# Altium PCB Copy of PCB1.PcbDoc
Units mm, origin at the board's own origin, x right, y up, seen from the top; angles counter-clockwise.
Board outline 63.5 x 43.05 mm, 2 copper layers (Top Layer, Bottom Layer); 70 components, 78 nets, 250 pads, 205 vias.
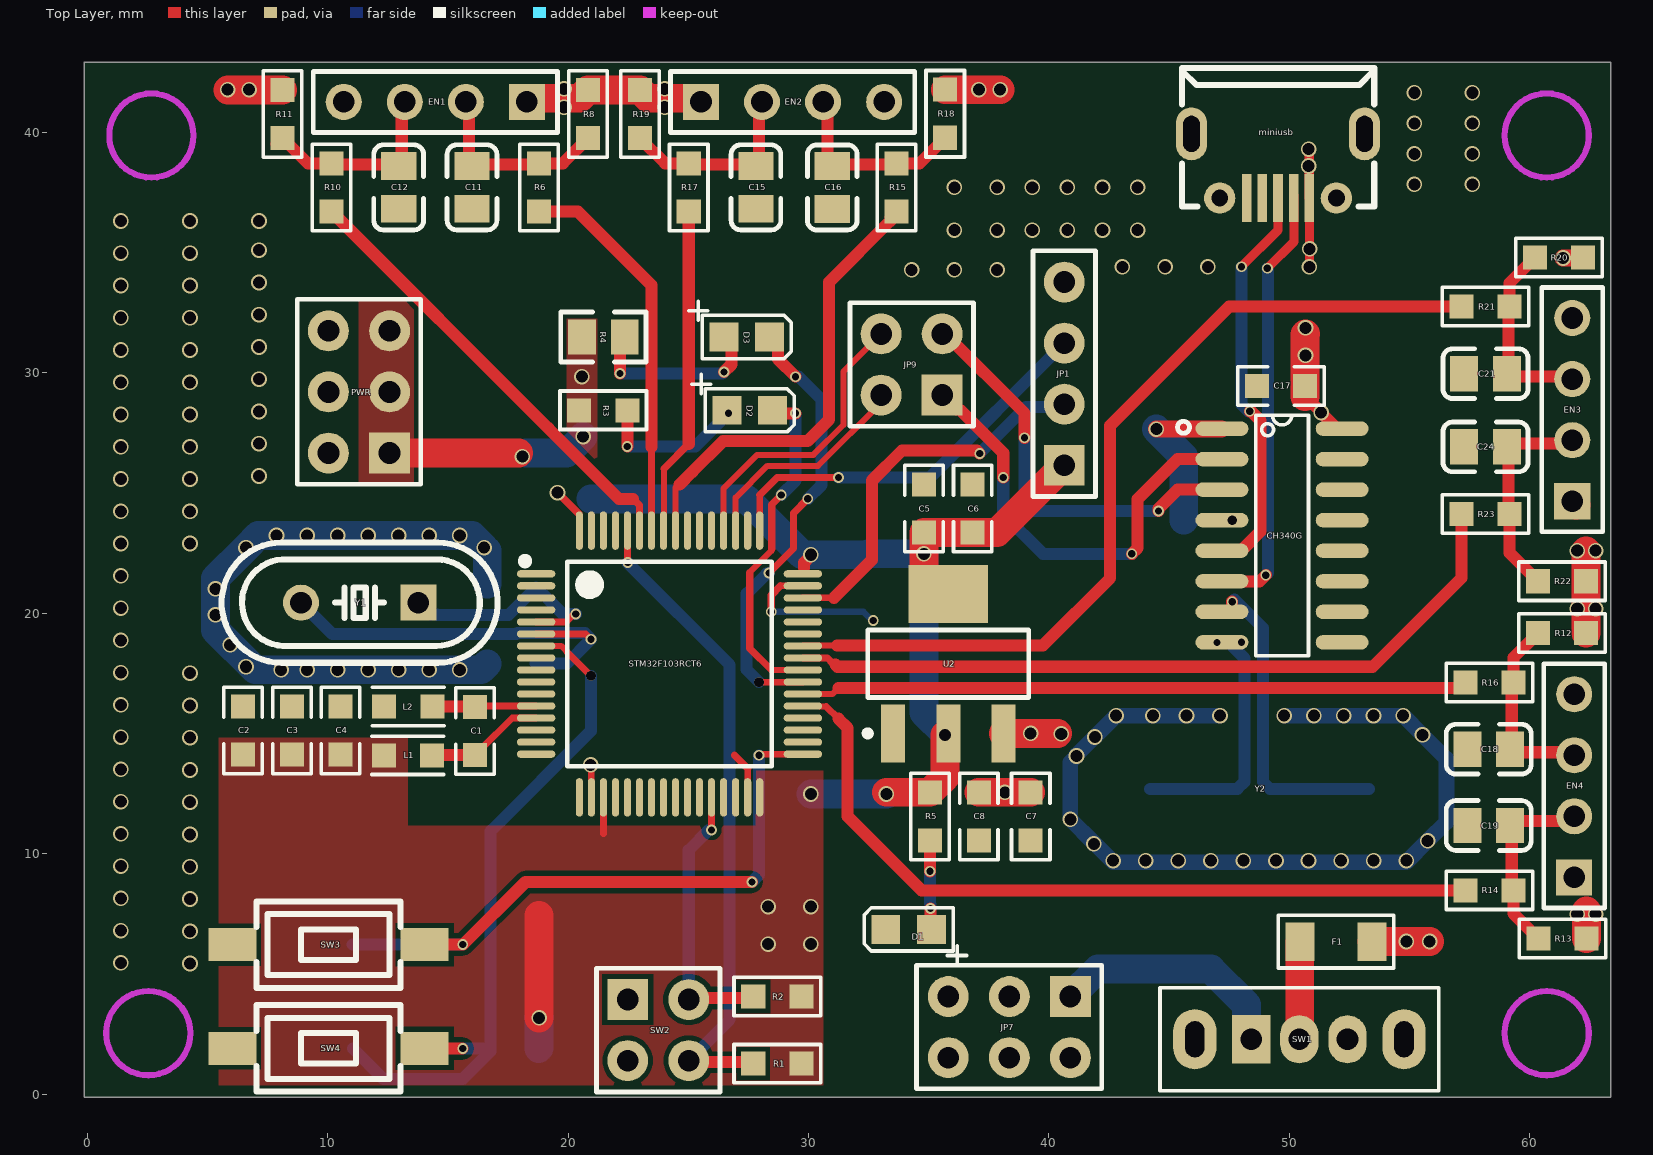
[diagram p0: Top Layer view]
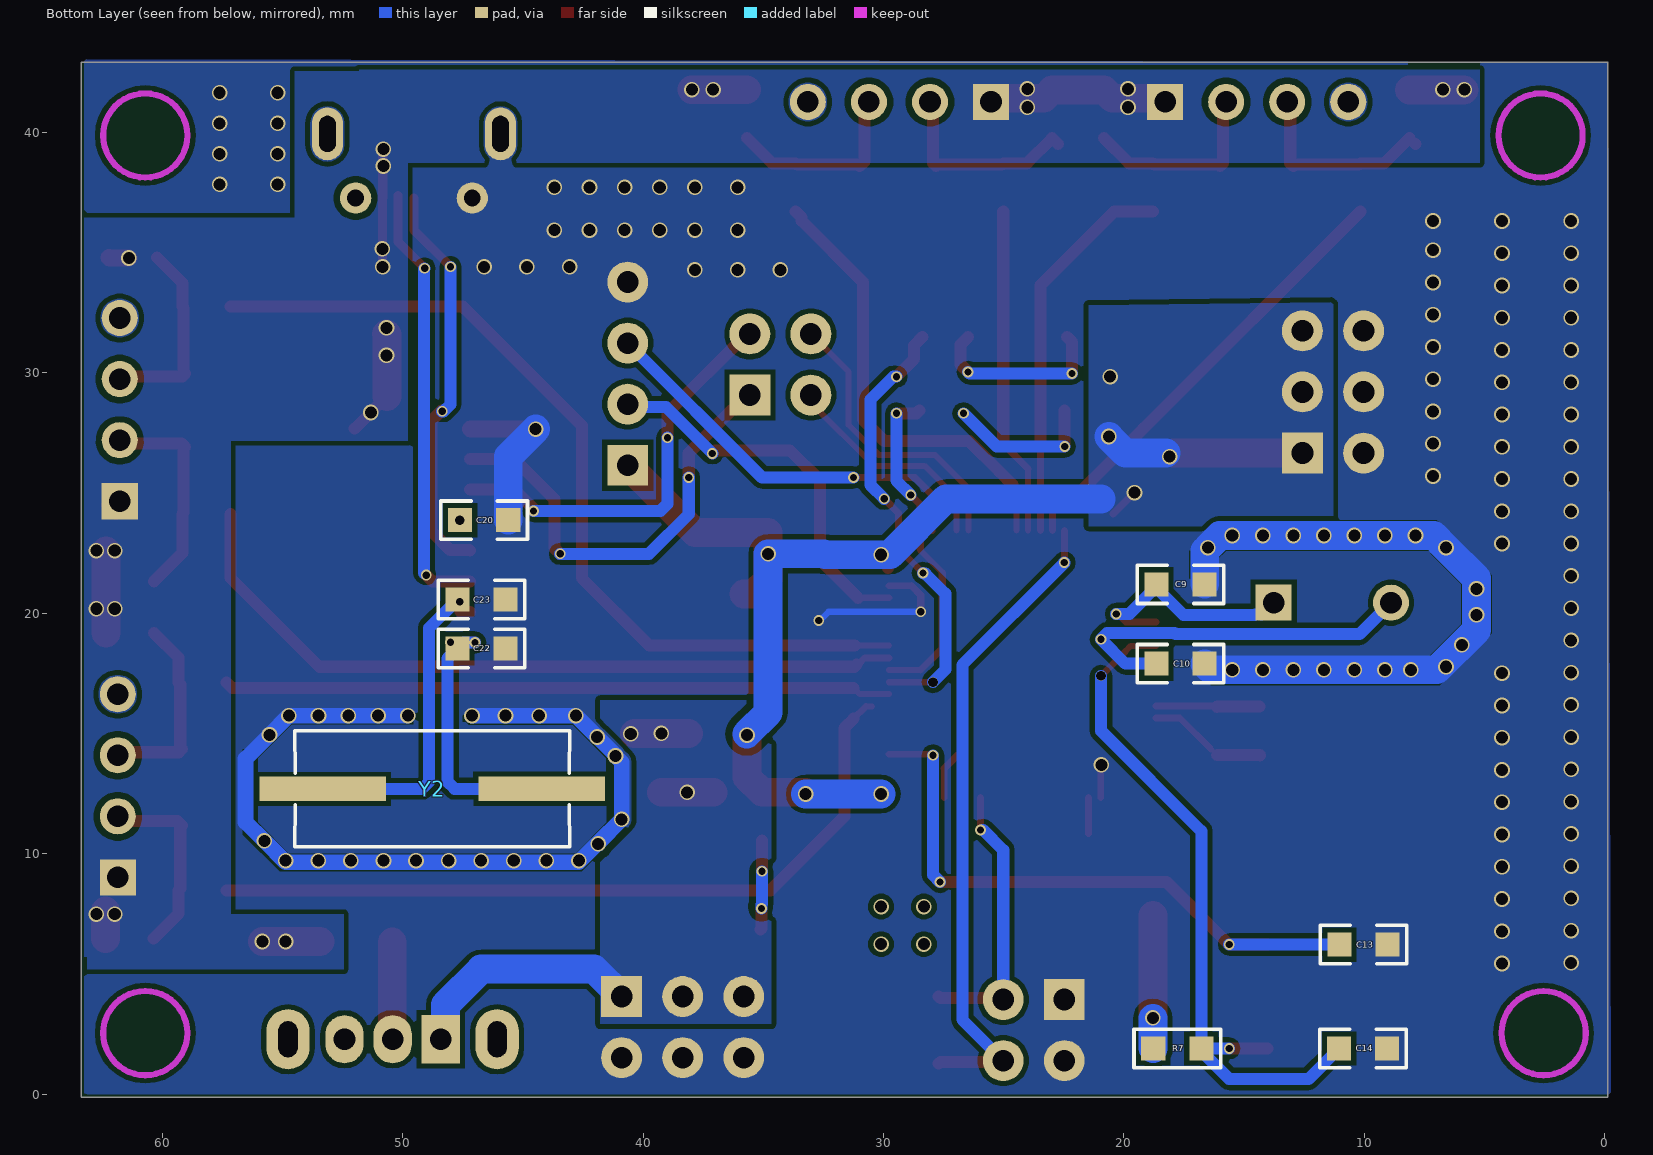
[diagram p1: Bottom Layer view, seen from below]

## Layer stack, top to bottom
Top Solder: solder mask 0.0102, Solder Resist, Dk 3.5
Top Layer: signal copper 0.0356
Dielectric 1: dielectric 0.32, FR-4, Dk 4.8
Bottom Layer: signal copper 0.0356
Bottom Solder: solder mask 0.0102, Solder Resist, Dk 3.5

## Board outline
-0.127,-0.127 -0.127,42.926 63.373,42.926 63.373,-0.127

## Design rules (kind name [scope] priority, off if disabled: settings)
Clearance Clearance_3 [InNetClass('SIGNAL')] p1: gap=0.203 ignorepadtopadclearanceinfootprint=TRUE
Clearance Clearance_1 [InNetClass('GND')] p2: gap=0.203 ignorepadtopadclearanceinfootprint=TRUE
Clearance Clearance_2 [InNetClass('PWR')] p3: gap=0.203 ignorepadtopadclearanceinfootprint=TRUE
Clearance [All] p4: gap=0.203 ignorepadtopadclearanceinfootprint=TRUE except(0.305: Arc-Fill Arc-Poly Arc-Region Track-Fill Track-Poly Track-Region SMDPad-Fill SMDPad-Poly SMDPad-Region THPad-Fill THPad-Poly THPad-Region Via-Fill Via-Poly Via-Region Fill-Fill Fill-Poly Fill-Region Poly-Poly Poly-Region Region-Region)
DiffPairsRouting [All] p1: maxlimit=0.3 minlimit=0.203 mostfreqgap=0.254 toplayer_minwidth=0.203 toplayer_maxwidth=0.254 toplayer_prefwidth=0.254 bottomlayer_minwidth=0.203 bottomlayer_maxwidth=0.254 bottomlayer_prefwidth=0.254 maxuncoupledlength=12.7
PolygonConnect [All] p1: connectstyle=Direct reliefconductorwidth=0.254 reliefentries=4 polygonreliefangle="90 Angle" airgapwidth=0.254
RoutingVias [All] p1: holewidth=0.711 width=1.27 viastyle="Through Hole" minholewidth=0.711 minwidth=1.27 maxholewidth=0.711 maxwidth=1.27
SolderMaskExpansion [All] p1: expansion=0.102 istentingtop=FALSE
Width Width_1 [InNetClass('SIGNAL')] p1: maxlimit=1.2 minlimit=0.254 preferedwidth=0.5 minimp=50.000000 maximp=50.000000 favimp=50.000000
Width [InNetClass('PWR')] p2: maxlimit=1.2 minlimit=0.3 preferedwidth=1.2 minimp=50.000000 maximp=50.000000 favimp=50.000000
Width Width_5 [InNetClass('SIGNAL')] p3: maxlimit=0.5 minlimit=0.3 preferedwidth=0.5 minimp=50.000000 maximp=50.000000 favimp=50.000000
Width Width_2 [InNetClass('GND')] p4: maxlimit=1.2 minlimit=0.3 preferedwidth=1.2 minimp=50.000000 maximp=50.000000 favimp=50.000000
Width Width_4 [InNetClass('PWR')] p5: maxlimit=1.2 minlimit=0.3 preferedwidth=0.254 minimp=50.000000 maximp=50.000000 favimp=50.000000
Width Width_3 [All] p6: maxlimit=10 minlimit=0.3 preferedwidth=0.5 minimp=50.000000 maximp=50.000000 favimp=50.000000
29 further rules are at their usual default settings.

## Classes and differential pairs
net class SIGNAL: BOOT0 BOOT1 CH340_D+ CH340_D- NetC9_1 NetC10_1 NetC11_2 NetC12_2 NetC18_1 NetC19_1 NetC20_1 NetC21_1 NetC22_1 NetC23_1 NetC24_1 NetD1_1 NetD2_1 NetD3_1 NetF1_2 NetJP2_2 NetJP2_3 PA0 PA1 PA2 PA3 PA4 PA5 PA6 PA7 PA8 PA9 PA10 PA11 PA12 PA15 PB0 PB1 PB3 PB4 PB5 PB6 PB7 PB8 PB9 PB10 PB11 PB12 PB13 PB14 PB15 PC0 PC1 PC2 PC3 PC4 PC5 PC6 PC7 PC8 PC9 PC10 PC11 PC12 PC13 PC14 PC15 PD2 RESET RX SWCLK SWDIO TX VDDA VSSA
net class GND: GND
net class PWR: 3.3V 5V VCC

## Components (designator, comment, footprint, x,y, rotation, side; value= is the part's Value field where it differs from the comment)
C1 "0805c" 0805C 16.129,15.113 r90 top
C2 "0805c" 0805C 6.477,15.129 r90 top
C3 "0805c" 0805C 8.509,15.129 r90 top
C4 "0805c" 0805C 10.541,15.129 r90 top
C5 "0805c" 0805C 34.798,24.368 r270 top
C6 "0805c" 0805C 36.83,24.368 r270 top
C7 "0805c" 0805C 39.243,11.557 r270 top
C8 "0805c" 0805C 37.084,11.557 r270 top
C9 "22pF" 0805C 17.653,21.209 r180 bottom
C10 "22pF" 0805C 17.653,17.907 r180 bottom
C11 "10nF" 0805_C 16.002,37.719 r90 top
C12 "10nF" 0805_C 12.954,37.719 r90 top
C13 "0805c" 0805C 10.033,6.223 r180 bottom
C14 "0805c" 0805C 10.049,1.905 r180 bottom
C15 "10nF" 0805_C 27.813,37.719 r90 top
C16 "10nF" 0805_C 30.988,37.718 r270 top
C17 "0805c" 0805C 49.657,29.464 r0 top
C18 "10nF (103) 10% 50V" 0805_C 58.293,14.351 r180 top
C19 "10nF (103) 10% 50V" 0805_C 58.293,11.176 r180 top
C20 "0805c" 0805C 46.609,23.876 r180 bottom
C21 "10nF" 0805_C 58.161,29.972 r180 top
C22 "0805c" 0805C 46.72,18.542 r180 bottom
C23 "0805c" 0805C 46.72,20.574 r180 bottom
C24 "10nF" 0805_C 58.161,26.924 r180 top
CH340G "CH340G" SOP16 49.697,23.241 r270 top (schematic designator U3)
D1 "LED" 0805D 34.163,6.858 r180 top
D2 "LED" 0805D 27.559,28.448 r0 top
D3 "LED" 0805D 27.432,31.496 r0 top
EN1 "PIN4" HDR1X4 18.288,41.275 r180 top (schematic designator JP4)
EN2 "PIN4" HDR1X4 25.527,41.275 r0 top (schematic designator JP2)
EN3 "PIN4" HDR1X4 61.768,24.665 r90 top (schematic designator JP5)
EN4 "PIN4" HDR1X4 61.849,9.017 r90 top (schematic designator JP3)
F1 "FUSE" 1206R 51.943,6.35 r180 top
JP1 "SWD" SWD 40.64,29.972 r90 top
JP7 "PWR5V" PWR 40.894,4.064 r180 top
JP9 "2*2" CON20VP2R54-2X2TM 34.29,30.353 r90 top
L1 "0805L" 0805L 13.335,14.097 r0 top
L2 "0805L" 0805L 13.351,16.129 r0 top
miniusb "miniusb" MICRO-USB-SMD_MICROXNJ 49.53,38.608 r180 top (schematic designator JP8)
PWR "PWR3.3V" PWR 12.573,26.67 r90 top (schematic designator JP6)
R1 "0805r" 0805R 28.702,1.27 r180 top
R2 "0805r" 0805R 28.702,4.064 r180 top
R3 "0805r" 0805R 21.463,28.448 r0 top
R4 "0805r" 0805_R 21.468,31.496 r0 top
R5 "0805r" 0805R 35.052,11.557 r90 top
R6 "10KΩ" 0805R 18.796,37.719 r270 top
R7 "0805r" 0805R 17.78,1.905 r0 bottom
R8 "10KΩ" 0805R 20.828,40.767 r270 top
R10 "10KΩ" 0805R 10.16,37.719 r270 top
R11 "10KΩ" 0805R 8.128,40.767 r270 top
R12 "10KΩ" 0805R 61.341,19.177 r180 top
R13 "10KΩ" 0805R 61.357,6.477 r0 top
R14 "10KΩ" 0805R 58.32,8.482 r0 top
R15 "10KΩ" 0805R 33.655,37.719 r270 top
R16 "10KΩ" 0805R 58.32,17.118 r0 top
R17 "10KΩ" 0805R 25.019,37.719 r270 top
R18 "10KΩ" 0805R 35.687,40.783 r90 top
R19 "10KΩ" 0805R 22.987,40.767 r270 top
R20 "10KΩ" 0805R 61.214,34.798 r180 top
R21 "10KΩ" 0805R 58.166,32.766 r180 top
R22 "10KΩ" 0805R 61.341,21.336 r180 top
R23 "10KΩ" 0805R 58.166,24.13 r180 top
STM32F103RCT6 "STM32F103RCT6" PCBComponent_1 19.98,22.086 r270 top (schematic designator U1)
SW1 "SWTICH_3P" SWITCH_3P 48.419,2.286 r0 top
SW2 "SW_BOOT" CON20VP2R54-2X2TM 23.749,2.667 r270 top
SW3 "KEY" SW-SMD_L6.1-W3.6-LS8.0 10.033,6.223 r180 top
SW4 "KEY" SW-SMD_L6.1-W3.6-LS8.0 10.033,1.905 r180 top
U2 "ASM1117-3.3" SOT223_N 35.814,17.907 r90 top
Y1 "8MHz" HC-49US_L11.5-W4.5-P4.88 11.33,20.447 r180 top
Y2 "8MHz" HC-49S_L11.4-W4.8 48.768,12.7 r180 top

## Footprints (in the part's own frame and the unit in brackets; to place one, negate y for a bottom-side part, rotate by r counter-clockwise, add the part's x,y. Pads: shape width x height; smd on the part's side, far side on the other; paste and mask are expansions set on the pad)
0805_C [mm]
  rect 1.16x1.47 smd: 1(-0.89,0) 2(0.89,0)
  silkscreen extent -1.77,-1.04 1.77,1.04, body extent -1,-0.62 1,0.63, height 0.77
0805_R [mm]
  rect 1.16x1.47 smd: 1(-0.89,0) 2(0.89,0)
  silkscreen extent -1.77,-1.04 1.77,1.03, body extent -1,-0.62 1,0.63, height 0.49
0805C [mm]
  rect 1x1 smd: 1(-1,0) 2(1,0)
  silkscreen extent -1.8,-0.8 1.8,0.8
0805D [mm]
  rect 1.2x1.2 smd: 1(-0.95,0) 2(0.95,0)
  silkscreen extent -2.42,-0.9 1.85,1.49
0805L [mm]
  rect 1x1 smd: 1(-1,0) 2(1,0)
  silkscreen extent -1.5,-0.8 1.5,0.8
0805R [mm]
  rect 1x1 smd: 1(-1,0) 2(1,0)
  silkscreen extent -1.8,-0.8 1.8,0.8
1206R [mm]
  rect 1.2x1.6 smd: 1(-1.5,0) 2(1.5,0)
  silkscreen extent -2.4,-1.1 2.4,1.1
CON20VP2R54-2X2TM [mm]
  rect 1.7x1.7 hole 0.9: 1(-1.27,-1.27)
  round 1.7 hole 0.9: 2(-1.27,1.27) 3(1.27,-1.27) 4(1.27,1.27)
  silkscreen extent -2.57,-2.57 2.57,2.57
HC-49S_L11.4-W4.8 [mm]
  rect 5.274x1.02 smd far side: 1(4.553,0) 2(-4.553,0)
HC-49US_L11.5-W4.5-P4.88 [mm]
  rect 1.5x1.5 hole 0.9: 1(-2.44,0)
  round 1.5 hole 0.9: 2(2.44,0)
  silkscreen extent -5.74,-2.5 5.74,2.5
HDR1X4 [mm] "Connector; Header; 4 Position"
  rect 1.5x1.5 hole 0.9: 1(0,0)
  round 1.5 hole 0.9: 2(2.54,0) 3(5.08,0) 4(7.62,0)
  silkscreen extent -1.27,-1.27 8.89,1.27
MICRO-USB-SMD_MICROXNJ [mm]
  rect 0.4x2 smd: 1(-1.3,1.327) 2(-0.65,1.327) 3(0,1.327) 4(0.65,1.327) 5(1.3,1.327)
  round 1.3 hole 0.7: 6(2.425,1.335) 9(-2.425,1.335)
  oval 1.3x2.2 hole 0.7 slot 1.5 at 90 deg: 7(3.6,-1.335) 8(-3.6,-1.335)
  silkscreen extent -4,-4.07 4,1.68
PCBComponent_1 [mm]
  oval 0.3x1.6 smd: 1(0.441,-1.311) 2(0.941,-1.311) 3(1.441,-1.311) 4(1.941,-1.311) 5(2.441,-1.311) 6(2.941,-1.311) 7(3.441,-1.311) 8(3.941,-1.311) 9(4.441,-1.311) 10(4.941,-1.311) 11(5.441,-1.311) 12(5.941,-1.311) 13(6.441,-1.311) 14(6.941,-1.311) 15(7.441,-1.311) 16(7.941,-1.311) 33(7.941,9.789) 34(7.441,9.789) 35(6.941,9.789) 36(6.441,9.789) 37(5.941,9.789) 38(5.441,9.789) 39(4.941,9.789) 40(4.441,9.789) 41(3.941,9.789) 42(3.441,9.789) 43(2.941,9.789) 44(2.441,9.789) 45(1.941,9.789) 46(1.441,9.789) 47(0.941,9.789) 48(0.441,9.789)
  oval 1.6x0.3 smd: 17(9.741,0.489) 18(9.741,0.989) 19(9.741,1.489) 20(9.741,1.989) 21(9.741,2.489) 22(9.741,2.989) 23(9.741,3.489) 24(9.741,3.989) 25(9.741,4.489) 26(9.741,4.989) 27(9.741,5.489) 28(9.741,5.989) 29(9.741,6.489) 30(9.741,6.989) 31(9.741,7.489) 32(9.741,7.989) 49(-1.359,7.989) 50(-1.359,7.489) 51(-1.359,6.989) 52(-1.359,6.489) 53(-1.359,5.989) 54(-1.359,5.489) 55(-1.359,4.989) 56(-1.359,4.489) 57(-1.359,3.989) 58(-1.359,3.489) 59(-1.359,2.989) 60(-1.359,2.489) 61(-1.359,1.989) 62(-1.359,1.489) 63(-1.359,0.989) 64(-1.359,0.489)
  silkscreen extent -0.24,-1.92 8.44,8.49
PWR [mm]
  rect 1.7x1.7 hole 0.9: 1(0,0)
  round 1.7 hole 0.9: 2(0,2.54) 3(2.54,0) 4(2.54,2.54) 5(5.08,0) 6(5.08,2.54)
  silkscreen extent -1.3,-1.3 6.4,3.84
SOP16 [mm]
  oval 0.6x2.2 smd: 1(-4.445,-2.5) 2(-3.175,-2.5) 3(-1.905,-2.5) 4(-0.635,-2.5) 5(0.635,-2.5) 6(1.905,-2.5) 7(3.175,-2.5) 8(4.445,-2.5) 9(4.445,2.5) 10(3.175,2.5) 11(1.905,2.5) 12(0.635,2.5) 13(-0.635,2.5) 14(-1.905,2.5) 15(-3.175,2.5) 16(-4.445,2.5)
  silkscreen extent -5,-4.35 5,1.1
SOT223_N [mm] "SOT223, 4-Leads, Body 6.5x3.5mm, Pitch 2.3mm, Lead Span 7mm, IPC Medium Density"
  rect 2.4x1 smd: 1(-2.9,2.3) 2(-2.9,0) 3(-2.9,-2.3)
  rect 2.4x3.3 smd: 4(2.9,0)
  silkscreen extent -3.02,-3.35 1.4,3.47, body extent -1.85,-3.35 1.85,3.35, height 1.7
SW-SMD_L6.1-W3.6-LS8.0 [mm]
  rect 2x1.38 smd: 1(-4,0) 2(4,0)
  silkscreen extent -3,-1.8 3,1.8
SWD [mm]
  rect 1.7x1.7 hole 0.9: 1(-3.81,0)
  round 1.7 hole 0.9: 2(-1.27,0) 3(1.27,0) 4(3.81,0)
  silkscreen extent -5.11,-1.3 5.11,1.3
SWITCH_3P [mm]
  rect 1.6x2 hole 0.9: 1(0,0)
  oval 1.6x2 hole 0.9: 2(2,0) 3(4,0)
  oval 1.8x2.5 hole 1.5 slot 0.8 at 0 deg: 4(-2.35,0) 4(6.35,0)
  silkscreen extent -3.8,-2.15 7.8,2.15

## Part data
C9 C10: library part "0805 22pF (220) 5% 50V", "贴片电容", Package=0805, SuppliersPartNumber=C1804, ComponentLink1Description=供应商链接, ComponentLink1URL=http://www.szlcsc.com/product/details_2156.html, Supplier=LC
C11 C12 C15 C16 C18 C19 C21 C24: library part "0805 10nF (103) 10% 50V", "贴片电容", Package=0805, SuppliersPartNumber=C1710, ComponentLink1Description=供应商链接, ComponentLink1URL=http://www.szlcsc.com/product/details_2062.html, Supplier=LC
R6 R8 R10 R11 R12 R13 R14 R15 R16 R17 R18 R19 R20 R21 R22 R23: library part "0805 10KΩ (1002) 1%", "贴片电阻", Package=0805, SuppliersPartNumber=C17414, ComponentLink1Description=供应商链接, ComponentLink1URL=http://www.szlcsc.com/product/details_18102.html, Supplier=LC
STM32F103RCT6: "ARM Cortex-M3 32-bit MCU, 256 KB Flash, 48 KB Internal RAM, 51 I/Os, 64-pin LQFP, -40 to 85 degC, Tray", I/Os (High Current)=51, Operating Frequency(F) (Processor speed) (MHz)=72, Supplier Part Number 1=497-9033-ND, Supply Voltage(Vcc) min (V)=2, A/D Converter="3x12-bit (16 Channel)", ComponentLink1Description="Manufacturer URL", ComponentLink1URL=http://www.st.com/web/en/home.html, ComponentLink2Description=Datasheet, ComponentLink2URL=http://www.st.com/st-web-ui/static/active/en/resource/technical/document/datasheet/CD00191185.pdf, ComponentLink3Description="Package Specification", ComponentLink3URL=http://www.st.com/st-web-ui/static/active/en/resource/technical/document/datasheet/DM00037051.pdf, Core="ARM Cortex-M3", D/A Converter="2x12-bit (2 Channel)", DatasheetVersion="Rev. 8", FLASH Size (Prog) (kB)=256, Internal RAM Size (kB)=48, Mounting Technology="Surface Mount", PackageDescription="64-Pin Low Profile Quad Flat Package, 10 x 10 mm Body, 0.5 mm Pitch", PackageReference=LQFP64, PackageVersion="Rev. 4, 06/2013", Packing=Tray, PartNumber=STM32F103RCT6, Supplier 1=Digi-Key, Supplier 2=Newark, Supplier 3=Newark, Supplier 4=Mouser, Supplier Part Number 2=01P4099, Supplier Part Number 3=57P1227, Supplier Part Number 4=511-STM32F103RCT6
SW3 SW4: library part KEY_4P
Y1 Y2: library part "SMD-5032_2P 8MHz 20ppm 20pF", "贴片晶振", Package=SMD-5032_2P, SuppliersPartNumber=C115962, ComponentLink1Description=供应商链接, ComponentLink1URL=http://www.szlcsc.com/product/details_117214.html, Supplier=LC

## Via types
v1: diameter 0.65, hole 0.5, Top Layer to Bottom Layer, 168 vias
v2: diameter 0.45, hole 0.3, Top Layer to Bottom Layer, 34 vias
v3: diameter 0.4, hole 0.4, Top Layer to Bottom Layer, 3 vias

## Nets (pads, with @x,y where several pads share a name; then routed paths per layer and width w, separated by ;. In a path a pad name is that pad's centre, name@x,y a point inside that pad or via, vN(x,y) a via of type N, cw(c..) or ccw(c..) an arc to the next point about the centre after c; other vN are vias at no path point)
3.3V: C2.1 C3.1 C4.1 C5.2 C6.2 JP1.1 L1.1 PWR.1 PWR.3 PWR.5 R1.1 R2.1 R3.1 R4.1 R5.2 R7.2 STM32F103RCT6.19 STM32F103RCT6.32 STM32F103RCT6.48 STM32F103RCT6.64 U2.2 U2.4 | length 57.5
  Top Layer w0.279: 21.469,10.839 STM32F103RCT6.19
  Top Layer w0.3: v1(19.558,25.019) 19.573,25.019 STM32F103RCT6.64@20.447,24.145
  Top Layer w0.5: 29.814,21.889 29.814,22.112 30.099,22.398 v1(30.099,22.438)
  Top Layer w1.2: PWR.1 v1@17.951,26.67 ; v1(18.796,3.175) 18.796,7.428 ; v1@33.241,12.557 R5.2 35.679,13.184 v1(35.679,14.938) ; U2.4 35.398,20.807 34.798,21.407 v1(34.798,22.479) C5.2 C6.2 37.846,23.368 JP1.1
  Bottom Layer w1.2: v1@18.251,26.67 19.939,26.67 v1(20.624,27.355) ; R7.2 18.796,1.921 v1@18.796,3.162 ; 20.955,24.765 27.403,24.765 29.729,22.438 v1(30.099,22.438) 32.428,22.438 32.469,22.479 v1(34.798,22.479) 34.798,15.875 v1@35.687,14.986 ; v1(30.099,12.488) v1(33.241,12.488)
  other v1: 28.321,6.239 30.099,6.239 28.321,7.801 30.099,7.801 18.101,26.52 20.574,29.845
5V: C7.1 C8.1 JP7.1 JP7.3 JP7.5 SW1.1 U2.3 | length 14.3
  Top Layer w1.2: C8.1 v1(38.163,12.557) C7.1 ; U2.3 v1(39.239,15.007) ; v1@39.243,15.004 v1(39.239,15.007) ; v1@40.365,15.007 40.132,15.007 v1(39.239,15.007)
  Bottom Layer w1.2: JP7.1 42.037,5.207 46.736,5.207 48.219,3.724 48.219,2.486 SW1.1
  other v1: 40.513,14.986
BOOT0: R1.2 STM32F103RCT6.60 SW2.4 | length 27.2
  Top Layer w0.279: v2@22.469,22.123 STM32F103RCT6.60
  Top Layer w0.3: v2@22.469,22.123 v2(22.481,22.111)
  Top Layer w0.5: SW2.4 25.082,1.333 27.638,1.333 R1.2
  Bottom Layer w0.5: v2(22.481,22.111) 22.481,22.096 26.72,17.857 26.72,3.098 SW2.4
BOOT1: R2.2 STM32F103RCT6.28 SW2.2 | length 11.5
  Top Layer w0.279: v2@25.969,10.991 STM32F103RCT6.28
  Top Layer w0.3: v2(25.966,10.988) v2@25.969,10.991
  Top Layer w0.5: SW2.2 25.082,4 27.638,4 R2.2
  Bottom Layer w0.5: SW2.2 25.019,10.152 v2@25.855,10.988
CH340_D+: CH340G.5 miniusb.3 | length 16.9
  Top Layer w0.381: v2(48.006,34.417) 49.53,35.941 miniusb.3
  Top Layer w0.5: CH340G.5 47.23,22.639 48.03,22.639 48.801,23.41 48.801,28.019 48.386,28.434 v2(48.356,28.405)
  Bottom Layer w0.5: v2(48.006,34.417) 48.006,28.698 48.299,28.405 v2(48.356,28.405)
CH340_D-: CH340G.6 miniusb.2 | length 18.1
  Top Layer w0.381: v2(49.085,34.353) 50.194,35.462 miniusb.2@50.194,37.378
  Top Layer w0.5: CH340G.6 48.768,21.336 v2(49.022,21.59)
  Bottom Layer w0.5: v2@49.085,21.653 49.11,21.678 49.11,34.329 v2(49.085,34.353)
GND: C2.2 C3.2 C4.2 C5.1 C6.1 C7.2 C8.2 C9.2 C10.2 C11.1 C12.1 C13.2 C14.2 C15.1 C16.2 C17.1 C18.2 C19.2 C20.2 C21.2 C22.2 C23.2 C24.2 CH340G.1 D1.2 EN1.4 EN2.4 EN3.4 EN4.4 JP1.4 JP7.2 JP7.4 JP7.6 L2.1 miniusb.5 miniusb.6 miniusb.7 miniusb.8 miniusb.9 PWR.2 PWR.4 PWR.6 STM32F103RCT6.1 STM32F103RCT6.18 STM32F103RCT6.31 STM32F103RCT6.47 STM32F103RCT6.63 SW2.1 SW2.3 SW3.2 SW4.2 U2.1 | length 81.3
  Top Layer w0.279: STM32F103RCT6.18 v1@20.969,13.745 ; STM32F103RCT6.31 27.469,13.552 ; 28.835,21.145 STM32F103RCT6.47
  Top Layer w0.3: 26.924,14.097 27.469,13.552 ; v2(28.448,20.066) 28.448,20.758 28.835,21.145
  Top Layer w0.7: v1(44.467,27.664) CH340G.1@47.175,27.664
  Bottom Layer w0.254: 5.804,21.853 5.804,21.858 ; v2(28.448,20.066) 32.285,20.066 32.639,19.712 v2@32.639,19.685 ; v1(41.865,10.414) v1@41.918,10.414 ; v1@41.899,14.859 v1(41.91,14.859) ; v1@42.672,9.652 v1@42.672,9.66
  Bottom Layer w0.65: v1(41.148,14.068) 40.894,13.814 v1(40.894,11.43) 41.865,10.459 v1(41.865,10.414) ; v1@41.148,14.108 v1@41.899,14.859 ; v1(41.91,14.859) v1(42.799,15.748) v1(44.323,15.748) v1(45.72,15.748) v1(47.117,15.748) ; v1@41.918,10.414 v1@42.672,9.66 ; v1@42.672,9.652 54.864,9.652 v1(55.753,10.541) 56.537,11.325 56.537,13.948 v1(55.538,14.947) v1(54.737,15.748) v1(53.499,15.748) v1(52.261,15.748) v1(51.022,15.748) v1(49.784,15.748)
  Bottom Layer w1.2: v1(16.51,22.733) 16.002,23.241 v1(14.224,23.241) v1(12.954,23.241) v1(11.684,23.241) v1(10.414,23.241) v1(9.144,23.241) v1(7.874,23.241) 7.112,23.241 v1(6.604,22.733) 5.334,21.463 v1(5.334,21.018) v1(5.334,19.939) 5.334,19.304 6.985,17.653 v1(8.065,17.653) v1(9.144,17.653) v1(10.414,17.653) v1(11.684,17.653) v1(12.954,17.653) v1(14.224,17.653) v1(15.494,17.653) 16.383,17.653 C10.2@16.637,17.907 ; C9.2@16.637,21.225 v1@16.637,22.606 ; v1(44.467,27.664) 45.609,26.522 C20.2
  other v1: 4.272,5.436 1.397,5.461 4.272,6.778 1.397,6.803 4.272,8.119 1.397,8.145 4.272,9.461 1.397,9.486 42.669,9.716 44.024,9.716 45.379,9.716 46.734,9.716 48.089,9.716 49.444,9.716 50.799,9.716 52.154,9.716 53.509,9.716 54.864,9.716 4.272,10.803 1.397,10.828 4.272,12.145 1.397,12.17 4.272,13.487 1.397,13.512 20.94,13.7 4.272,14.828 1.397,14.853 4.272,16.17 1.397,16.195 4.272,17.512 1.397,17.537 6.604,17.78 5.944,18.694 1.397,18.879 1.397,20.221 1.397,21.562 1.397,22.904 4.272,22.904 15.494,23.241 1.397,24.246 4.272,24.246 1.397,25.588 4.272,25.588 7.146,25.715 1.397,26.929 4.272,26.93 7.146,27.057 1.397,28.271 4.272,28.271 7.146,28.398 1.397,29.613 4.272,29.613 7.146,29.74 1.397,30.955 4.272,30.955 7.146,31.082 1.397,32.297 4.272,32.297 7.146,32.424 1.397,33.638 4.272,33.638 7.146,33.765 34.29,34.29 36.068,34.29 37.846,34.29 43.053,34.417 44.831,34.417 46.609,34.417 1.397,34.98 4.272,34.98 7.146,35.107 36.068,35.941 37.846,35.941 39.307,35.941 40.767,35.941 42.227,35.941 43.688,35.941 1.397,36.322 4.272,36.322 7.146,36.322 36.068,37.719 37.846,37.719 39.307,37.719 40.767,37.719 42.227,37.719 43.688,37.719 55.199,37.846 57.612,37.846 55.199,39.116 57.612,39.116 55.199,40.386 57.612,40.386 55.199,41.656 57.612,41.656
  other v2: 32.695,19.709
NetC9_1: C9.1 STM32F103RCT6.5 Y1.1 | length 9.2
  Top Layer w0.279: STM32F103RCT6.5 19.919,19.645 v2@20.222,19.948
  Top Layer w0.3: v2@20.222,19.948 20.291,19.948 v2(20.32,19.977)
  Bottom Layer w0.5: Y1.1 Y1.1@14.27,19.947 ; 14.555,19.947 14.563,19.939 17.526,19.939 18.669,21.082 19.774,19.977 v2(20.32,19.977)
NetC10_1: C10.1 STM32F103RCT6.6 Y1.2 | length 17.8
  Top Layer w0.279: STM32F103RCT6.6 20.733,19.145 v2(20.955,18.923)
  Bottom Layer w0.5: Y1.2 10.198,19.139 17.857,19.139 17.895,19.177 20.701,19.177 v2(20.955,18.923) 19.939,17.907 C10.1
NetC11_2: C11.2 EN1.2 R6.1 R8.2 | length 8.2
  Top Layer w0.5: EN1.2@15.811,41.338 EN1.2 15.875,41.148 15.875,38.736 C11.2 16.057,38.664 18.741,38.664 R6.1 19.78,38.719 R8.2
NetC12_2: C12.2 EN1.3 R10.1 R11.2 | length 8.1
  Top Layer w0.5: R11.2 9.176,38.719 R10.1 10.215,38.664 12.899,38.664 C12.2 13.081,38.736 13.081,41.148 EN1.3
NetC18_1: C18.1 EN4.3 R12.2 R16.2 | length 8.1
  Top Layer w0.5: R12.2 59.32,18.156 R16.2 59.251,17.049 59.251,14.419 C18.1 59.31,14.224 61.722,14.224 EN4.3
NetC19_1: C19.1 EN4.2 R13.1 R14.2 | length 8
  Top Layer w0.5: R13.1 59.32,7.514 R14.2 59.251,8.551 59.251,11.108 C19.1 59.374,11.367 61.658,11.367 EN4.2
NetC20_1: C20.1 CH340G.4
  other v3: 47.625,23.876
NetC21_1: C21.1 EN3.3 R20.2 R21.1 | length 8.1
  Top Layer w0.5: R20.2 59.166,33.75 R21.1 59.108,32.708 59.108,30.029 C21.1 59.164,29.859 61.654,29.859 EN3.3
NetC22_1: C22.1 CH340G.8 Y2.1 | length 10.8
  Top Layer w0.5: v2(46.994,18.792) 47.193,18.792 CH340G.8
  Bottom Layer w0.5: Y2.1 47.84,12.7 48.133,12.993 48.133,18.129 47.47,18.792 v2(46.994,18.792)
  other v2: 48.006,18.796
NetC23_1: C23.1 CH340G.7 Y2.2 | length 13.4
  Top Layer w0.5: CH340G.7 47.579,20.066 47.625,20.112 v2(47.625,20.486)
  Bottom Layer w0.5: C23.1 48.895,19.399 48.895,12.993 49.188,12.7 Y2.2
NetC24_1: C24.1 EN3.2 R22.2 R23.1 | length 9
  Top Layer w0.5: R22.2 60.091,21.586 59.166,22.511 R23.1 59.108,24.188 59.108,26.867 C24.1 59.191,27.065 61.627,27.065 EN3.2
NetD1_1: D1.1 R5.1 | length 3.7
  Top Layer w0.5: v2(35.052,9.271) R5.1 ; v2(35.076,7.728) 35.076,6.895 D1.1
  Bottom Layer w0.5: v2(35.052,9.271) 35.052,7.919 35.076,7.895 v2(35.076,7.728)
NetD2_1: D2.1 R3.2 | length 6.3
  Top Layer w0.5: v2(22.463,26.94) R3.2
  Bottom Layer w0.5: v2(22.463,26.94) 25.289,26.94 v2(26.67,28.321)
NetD3_1: D3.1 R4.2 | length 7.7
  Top Layer w0.5: v2(22.157,29.978) 22.157,31.295 R4.2 ; v2(26.482,30.038) 26.797,30.353 26.797,31.181 D3.1
  Bottom Layer w0.5: v2(22.157,29.978) 26.422,29.978 v2(26.482,30.038)
NetF1_2: F1.2 SW1.2 | length 4.1
  Top Layer w0.5: SW1.2 SW1.2@50.431,2.298 ; F1.2@50.431,6.338 F1.2
  Top Layer w1.2: SW1.2@50.431,2.298 F1.2@50.431,6.338
NetJP2_2: C15.2 EN2.2 R17.1 R19.2 | length 8.6
  Top Layer w0.5: R19.2@22.737,39.517 R19.2 24.035,38.719 R17.1 25.074,38.664 27.758,38.664 C15.2 27.94,38.736 27.94,41.148 EN2.2 EN2.2@27.94,41.402
NetJP2_3: C16.1 EN2.3 R15.1 R18.1 | length 8.2
  Top Layer w0.5: EN2.3@30.734,41.402 EN2.3 30.797,41.084 30.797,38.798 C16.1 31.043,38.663 33.6,38.663 R15.1 34.623,38.719 35.437,39.533 R18.1
PA0: STM32F103RCT6.14
PA1: STM32F103RCT6.15
PA2: STM32F103RCT6.16
PA3: STM32F103RCT6.17
PA4: STM32F103RCT6.20
PA5: STM32F103RCT6.21
PA6: STM32F103RCT6.22
PA7: STM32F103RCT6.23
PA8: R23.2 STM32F103RCT6.41 | length 31.7
  Top Layer w0.279: STM32F103RCT6.41 30.789,18.145
  Top Layer w0.3: 30.789,18.145 31.011,17.924 31.027,17.924 31.082,17.869
  Top Layer w0.5: 31.12,17.869 31.209,17.78 53.467,17.78 57.166,21.479 R23.2
PA9: R21.2 STM32F103RCT6.42 | length 36.8
  Top Layer w0.254: STM32F103RCT6.42@29.763,18.66 30.991,18.66
  Top Layer w0.5: 31.19,18.669 39.751,18.669 42.545,21.463 42.545,27.813 47.498,32.766 R21.2
PA10: STM32F103RCT6.43
PA11: STM32F103RCT6.44
PA12: STM32F103RCT6.45
PA15: STM32F103RCT6.50
PB0: STM32F103RCT6.26
PB1: STM32F103RCT6.27
PB3: STM32F103RCT6.55
PB4: R15.2 STM32F103RCT6.56 | length 18.9
  Top Layer w0.254: STM32F103RCT6.56 24.469,25.231
  Top Layer w0.5: 24.639,25.358 25.168,25.886 26.453,27.172 29.966,27.172 30.861,28.067 30.861,33.782 33.405,36.326 33.405,36.469 R15.2
PB5: R17.2 STM32F103RCT6.57 | length 13.7
  Top Layer w0.254: STM32F103RCT6.57@23.985,23.445 23.985,26.017
  Top Layer w0.3: 23.985,26.017 25.019,27.051
  Top Layer w0.5: 25.019,27.051 25.019,35.306 R17.2
PB6: R6.2 STM32F103RCT6.58 | length 16.2
  Top Layer w0.279: STM32F103RCT6.58 23.469,26.924
  Top Layer w0.5: R6.2 20.405,36.719 23.469,33.655 23.469,26.924
PB7: R10.2 STM32F103RCT6.59 | length 18.9
  Top Layer w0.279: STM32F103RCT6.59 22.969,24.5
  Top Layer w0.3: 22.704,24.765 22.969,24.5
  Top Layer w0.5: R10.2 19.177,27.702 22.114,24.765 22.704,24.765
PB8: STM32F103RCT6.61
PB9: STM32F103RCT6.62
PB10: STM32F103RCT6.29
PB11: STM32F103RCT6.30
PB12: C13.1 STM32F103RCT6.33 SW3.1 | length 26.5
  Top Layer w0.279: v2@27.988,14.145 STM32F103RCT6.33
  Top Layer w0.5: SW3.1 v2(15.621,6.223) 18.228,8.83 v2(27.647,8.83)
  Bottom Layer w0.5: C13.1 v2(15.621,6.223) ; v2(27.647,8.83) 27.94,9.123 v2(27.94,14.097)
PB13: STM32F103RCT6.34
PB14: STM32F103RCT6.35
PB15: STM32F103RCT6.36
PC0: STM32F103RCT6.8
PC1: STM32F103RCT6.9
PC2: STM32F103RCT6.10
PC3: STM32F103RCT6.11
PC4: STM32F103RCT6.24
PC5: STM32F103RCT6.25
PC6: R14.1 STM32F103RCT6.37 | length 32.2
  Top Layer w0.254: STM32F103RCT6.37@30.48,16.129 30.734,16.129
  Top Layer w0.279: 30.734,16.129 31.242,15.621
  Top Layer w0.5: 31.242,15.621 31.623,15.24 31.623,11.557 34.698,8.482 R14.1
PC7: R16.1 STM32F103RCT6.38 | length 27.7
  Top Layer w0.254: STM32F103RCT6.38 30.996,16.645 31.242,16.891
  Top Layer w0.5: 31.242,16.891 57.093,16.891 R16.1
PC8: D3.2 STM32F103RCT6.39 | length 18.7
  Top Layer w0.254: v3(27.94,17.137) STM32F103RCT6.39@29.769,17.137
  Top Layer w0.3: v2(28.359,21.682) 29.377,22.7 29.377,24.17 v2(29.972,24.765)
  Top Layer w0.5: D3.2 28.728,31.15 28.728,30.581 v2(29.464,29.845)
  Bottom Layer w0.5: v3@27.949,17.136 27.428,17.657 27.428,20.824 28.258,21.653 28.33,21.653 v2(28.359,21.682) ; v2(29.464,29.845) 29.591,29.845 30.548,28.888 30.548,26.322 30.548,25.341 v2(29.972,24.765)
PC9: D2.2 STM32F103RCT6.40 | length 14.2
  Top Layer w0.254: 27.559,21.706 28.449,22.596 28.449,22.659 28.472,22.682 ; 28.456,17.645 STM32F103RCT6.40
  Top Layer w0.3: 27.559,21.706 27.559,18.542 28.456,17.645 ; 28.472,22.682 28.472,24.527 v2(28.87,24.925)
  Top Layer w0.5: D2.2 28.636,28.321 v2(29.464,28.321)
  Bottom Layer w0.5: v2(28.87,24.925) 29.464,25.519 v2(29.464,28.321)
PC10: JP9.2 STM32F103RCT6.51 | length 9.4
  Top Layer w0.254: STM32F103RCT6.51 26.969,24.81 28.293,26.134 30.395,26.134 33.02,28.759 JP9.2
PC11: JP9.4 STM32F103RCT6.52 | length 12.3
  Top Layer w0.254: STM32F103RCT6.52 26.469,25.199 27.861,26.591 30.206,26.591 31.45,27.835 31.45,30.053 JP9.4
PC12: STM32F103RCT6.53
PC13: STM32F103RCT6.2
PC14: STM32F103RCT6.3
PC15: STM32F103RCT6.4
PD2: STM32F103RCT6.54
RESET: C14.1 R7.1 STM32F103RCT6.7 SW4.1 | length 29.5
  Top Layer w0.254: STM32F103RCT6.7 19.709,18.645 19.939,18.415
  Top Layer w0.279: 19.939,18.415 v3(20.955,17.399)
  Top Layer w0.5: SW4.1 14.037,1.901 v2(15.617,1.901)
  Bottom Layer w0.5: C14.1 12.319,0.635 15.621,0.635 R7.1@16.764,1.778 ; v2@15.621,1.905 R7.1 16.78,10.938 20.955,15.113 v3(20.955,17.399)
RX: CH340G.3 JP9.3 | length 17.3
  Top Layer w0.5: JP9.3 35.687,31.623 38.989,28.321 v2(38.989,27.305) ; v2(44.556,24.257) 44.556,24.355 45.347,25.146 CH340G.3
  Bottom Layer w0.5: v2(38.989,27.305) 38.989,24.55 39.282,24.257 v2(44.556,24.257)
SWCLK: JP1.3 STM32F103RCT6.49 | length 16.8
  Top Layer w0.279: STM32F103RCT6.49 27.969,24.921
  Top Layer w0.3: 27.969,24.921 28.702,25.654 v2(31.251,25.654)
  Bottom Layer w0.5: v2(31.251,25.654) 35.052,25.654 JP1.3
SWDIO: JP1.2 STM32F103RCT6.46 | length 16.2
  Top Layer w0.279: STM32F103RCT6.46 31.059,20.645
  Top Layer w0.5: 31.059,20.645 32.639,22.225 32.639,25.527 33.884,26.772 37.004,26.772 v2(37.12,26.656)
  Bottom Layer w0.5: v2(37.12,26.656) 39.04,28.576 40.514,28.576 JP1.2
TX: CH340G.2 JP9.1 | length 18.7
  Top Layer w0.5: JP9.1 36.16,28.483 36.287,28.483 38.1,26.67 v2(38.1,25.654) ; v2(43.447,22.479) 43.688,22.72 43.688,24.757 45.347,26.416 CH340G.2
  Bottom Layer w0.5: v2(38.1,25.654) 38.1,24.13 39.751,22.479 v2(43.447,22.479)
VCC: C17.2 CH340G.16 EN1.1 EN2.1 EN3.1 EN4.1 F1.1 miniusb.1 R8.1 R11.1 R12.1 R13.2 R18.2 R19.1 R20.1 R22.1 | length 29.6
  Top Layer w0.381: v1(50.83,34.417) 50.838,34.425 50.838,35.153 v1(50.847,35.161) 50.838,35.17 50.838,37.272 miniusb.1 50.83,38.608 v1@50.83,39.313
  Top Layer w0.5: C17.2@50.657,29.026 CH340G.16@51.997,27.686
  Top Layer w0.7: v1(61.388,34.78) 62.196,34.78 R20.1
  Top Layer w1.2: v1@5.858,41.767 R11.1 ; EN1.1 18.438,41.425 20.193,41.425 20.486,41.425 R8.1 R19.1 23.329,41.425 25.377,41.425 EN2.1 ; R18.2 v1(37.084,41.783) v1(37.973,41.783) ; C17.2@50.657,29.026 C17.2 50.657,31.607 v1@50.673,31.623 ; F1.1 v1(54.864,6.35) v1(55.838,6.35) ; EN3.1 EN3.1@61.918,24.515 ; R12.1 R22.1 62.341,22.606 ; R13.2 62.357,7.62
  other v1: 61.976,7.493 62.738,7.493 61.976,20.193 62.738,20.193 61.976,22.606 62.738,22.606 51.327,28.356 50.673,30.734 50.673,31.877 50.8,38.608 50.8,39.313 19.828,41.053 24.019,41.053 5.842,41.783 6.731,41.783 19.828,41.815 24.019,41.815
VDDA: C1.1 L1.2 STM32F103RCT6.13 | length 4.6
  Top Layer w0.279: C1.1@16.383,14.351 17.677,15.645 STM32F103RCT6.13
  Top Layer w0.5: L1.2 14.343,14.105 16.121,14.105 C1.1
VSSA: C1.2 L2.2 STM32F103RCT6.12 | length 4.3
  Top Layer w0.279: C1.2@16.121,16.145 STM32F103RCT6.12
  Top Layer w0.5: L2.2 14.359,16.121 16.121,16.121 C1.2
pads on no net: CH340G.9 CH340G.10 CH340G.11 CH340G.12 CH340G.13 CH340G.14 CH340G.15 miniusb.4 SW1.3 SW1.4

## Polygon pours and split planes (outlines as drawn)
3.3V on Top Layer "3.3V_L01_P016" (solid, remove dead copper, pour order 16): 5.461,10.414 13.34,10.414 13.34,14.828 5.461,14.828
3.3V on Top Layer "3.3V_L01_P014" (solid, remove dead copper, pour order 14): 27.813,13.462 27.813,7.62 30.607,7.62 30.607,13.462
3.3V on Top Layer "3.3V_L01_P000" (solid, remove dead copper, pour order 0): 11.303,25.4 13.589,25.4 13.589,33.02 11.303,33.02
3.3V on Top Layer "3.3V_L01_P012" (solid, remove dead copper, pour order 12): 19.939,32.258 21.209,32.258 21.209,26.035 19.939,26.035
3.3V on Top Layer "3.3V_L01_P011" (solid, remove dead copper, pour order 11): 5.461,11.176 30.607,11.176 30.607,0.381 5.461,0.381
3.3V on Top Layer "3.3V_L01_P002" (solid, remove dead copper, pour order 2): 5.588,14.732 13.081,14.732 13.081,13.335 5.588,13.335
VCC on Bottom Layer "VCC_L02_P009" (solid, remove dead copper, pour order 9): 52.451,7.493 63.119,7.493 63.119,5.207 52.451,5.207
VCC on Bottom Layer "VCC_L02_P008" (solid, remove dead copper, pour order 8): 57.15,35.941 63.246,35.941 63.246,5.715 57.15,5.715
GND on Bottom Layer "GND_L02_P015" (solid, remove dead copper, pour order 15): -0.127,42.926 63.246,43.053 63.246,-0.127 63.119,0 -0.254,0
VCC on Bottom Layer "VCC_L02_P013" (solid, remove dead copper, pour order 13): 52.197,27.178 52.197,36.449 63.246,36.449 63.246,27.178
5V on Bottom Layer "5V_L02_P010" (solid, remove dead copper, pour order 10): 34.671,16.383 41.783,16.383 41.783,2.921 34.671,2.921
VCC on Bottom Layer "VCC_L02_P007" (solid, remove dead copper, pour order 7): 49.784,42.545 54.483,42.545 54.483,27.178 49.784,27.178
VCC on Bottom Layer "VCC_L02_P004" (solid, remove dead copper, pour order 4): 5.207,42.608 51.816,42.608 51.816,38.735 5.207,38.735
3.3V on Bottom Layer "3.3V_L02_P001" (solid, remove dead copper, pour order 1): 11.303,32.947 11.303,23.622 21.463,23.622 21.463,25.654 21.463,32.82

## Keep-outs
Keep-Out Layer:
  circle w0.254: c2.54,2.54 r1.75
  circle w0.254: c60.706,2.54 r1.75
  circle w0.254: c60.706,39.878 r1.75
  circle w0.254: c2.667,39.878 r1.75

## Other copper
Top Layer:
  pour cut-out: 15.494,18.288 15.748,18.034 15.748,17.018 16.256,17.018 16.573,17.335 15.875,18.034 15.875,18.288
  pour cut-out: 42.672,16.002 47.244,16.002 47.498,15.748 47.498,15.494 47.371,15.367 42.926,15.367 41.402,13.843 41.402,11.303 42.799,9.906 54.737,9.906 54.737,10.033 56.007,11.303 56.007,13.97 54.61,15.367 49.53,15.367 49.53,15.621 49.403,15.748 49.657,16.002 54.864,16.002 56.642,14.224 56.642,11.049 54.864,9.271 42.545,9.271 40.767,11.049 40.767,14.097
  pour cut-out: 16.129,22.225 16.891,22.987 17.272,22.606 17.272,21.59 17.145,21.463 16.129,21.463
  pour cut-out: 16.129,23.749 17.272,22.606 16.51,22.606 16.129,22.225 15.748,22.606 15.621,22.606
  pour cut-out: 15.748,18.288 16.002,18.288 16.129,18.415 16.891,17.653 16.256,17.018
  pour cut-out: 7.239,18.288 15.748,18.288 15.748,17.526 16.256,17.018 6.858,17.018
  pour cut-out: 4.699,19.177 6.858,17.018 7.239,17.399 7.239,18.288 5.969,19.558
  pour cut-out: 4.826,21.717 4.699,21.59 4.699,19.177 5.588,19.177 5.969,19.558 5.969,21.209
  pour cut-out: 6.858,23.749 4.826,21.717 5.334,21.209 5.969,21.209 7.366,22.606
  pour cut-out: 6.858,23.749 16.129,23.749 16.129,22.606 7.366,22.606
Bottom Layer:
  pour cut-out: 42.672,16.002 47.244,16.002 47.498,15.748 47.498,15.494 47.371,15.494 47.244,15.367 42.926,15.367 41.529,13.97 41.529,11.303 42.799,10.033 54.737,10.033 56.007,11.303 56.007,13.97 54.61,15.367 49.53,15.367 49.53,15.621 49.403,15.748 49.657,16.002 54.864,16.002 56.515,14.351 56.642,14.351 56.642,10.795 55.118,9.271 42.545,9.271 40.767,11.049 40.767,14.097
  pour cut-out: 6.985,23.876 15.875,23.876 17.145,22.606 17.272,22.606 17.272,21.463 17.145,21.336 16.129,21.336 16.129,22.225 15.748,22.606 7.239,22.606 7.239,22.479 5.969,21.209 5.969,19.558 7.366,18.161 16.383,18.161 16.891,17.653 16.383,17.145 16.383,17.018 6.858,17.018 4.699,19.177 4.699,21.59

## Silkscreen, mask and mechanical layers (free items; w line width, h text height)
Mechanical 1:
  circle w0.254: c2.54,2.54 r1.75
  circle w0.254: c60.706,2.54 r1.75
  circle w0.254: c60.706,39.878 r1.75
  circle w0.254: c2.667,39.878 r1.75
  lines w0.254: -0.127,-0.127 63.373,-0.127 63.373,42.926 -0.127,42.926 -0.127,-0.127
Mechanical 15:
  lines w0.003: 49.6,38.919 49.65,38.97